# Altium PCB Pedal_SD_USB.PcbDoc
Units mil, origin at the board's own origin, x right, y up, seen from the top; angles counter-clockwise.
Board outline 1550 x 855 mil, 3 copper layers (Top Layer, Mid-Layer 3, Bottom Layer); 22 components, 20 nets, 89 pads, 35 vias.
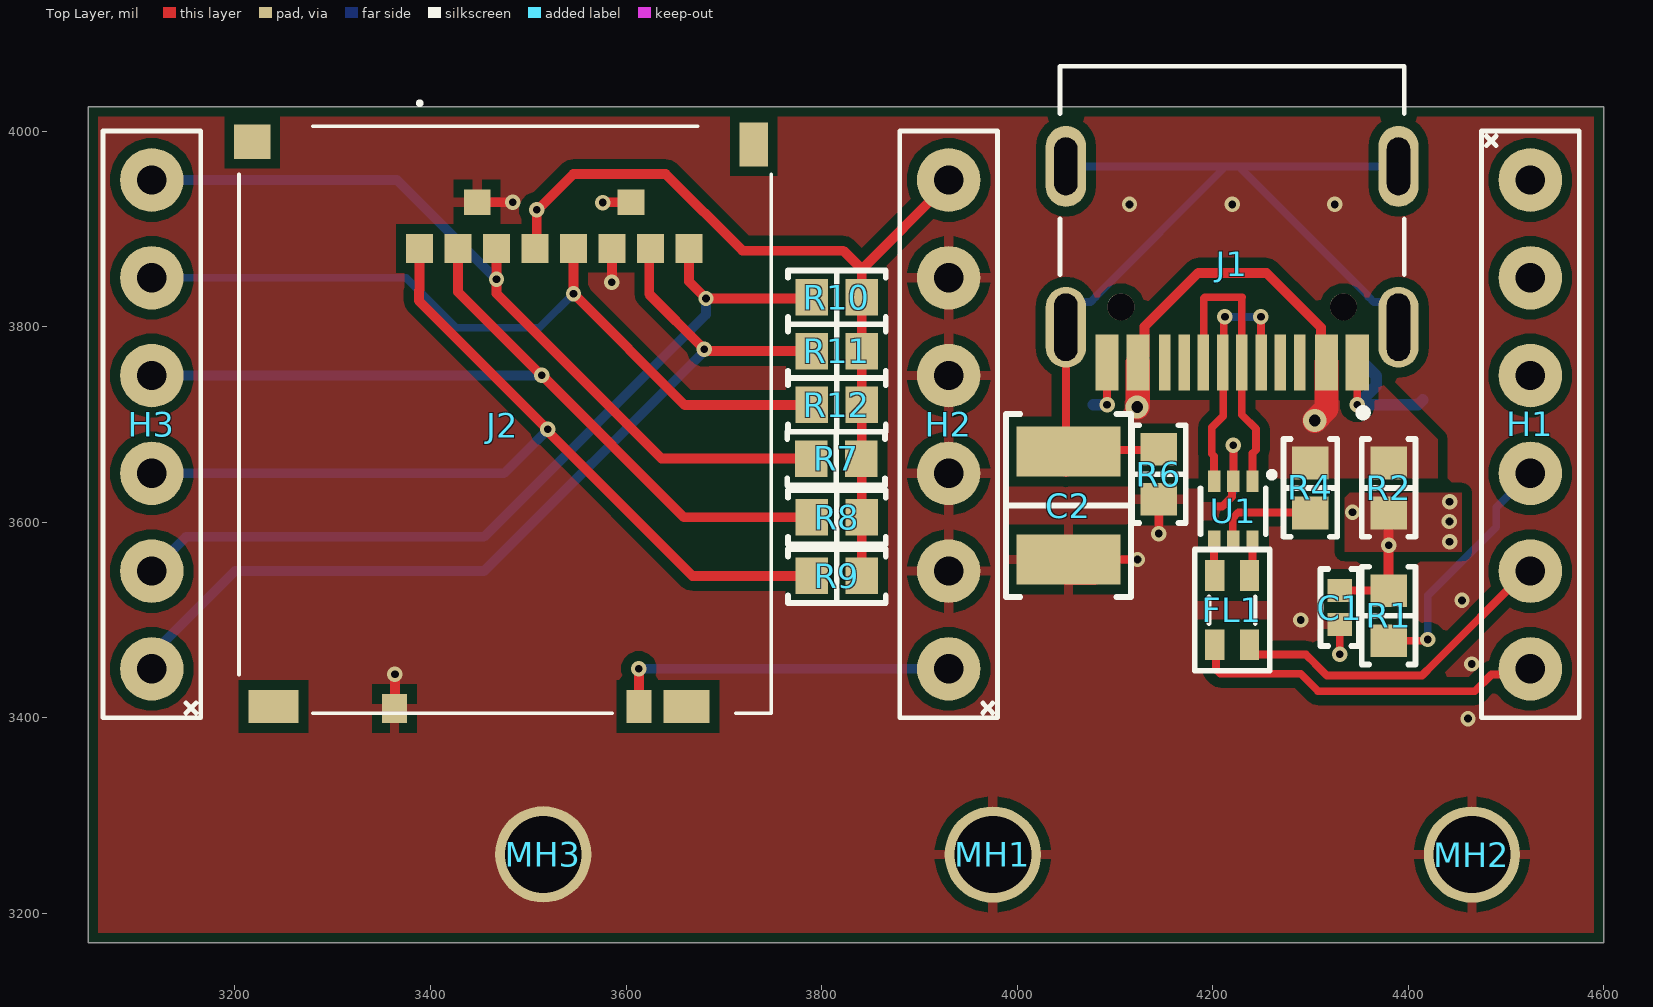
[diagram p0: Top Layer view]
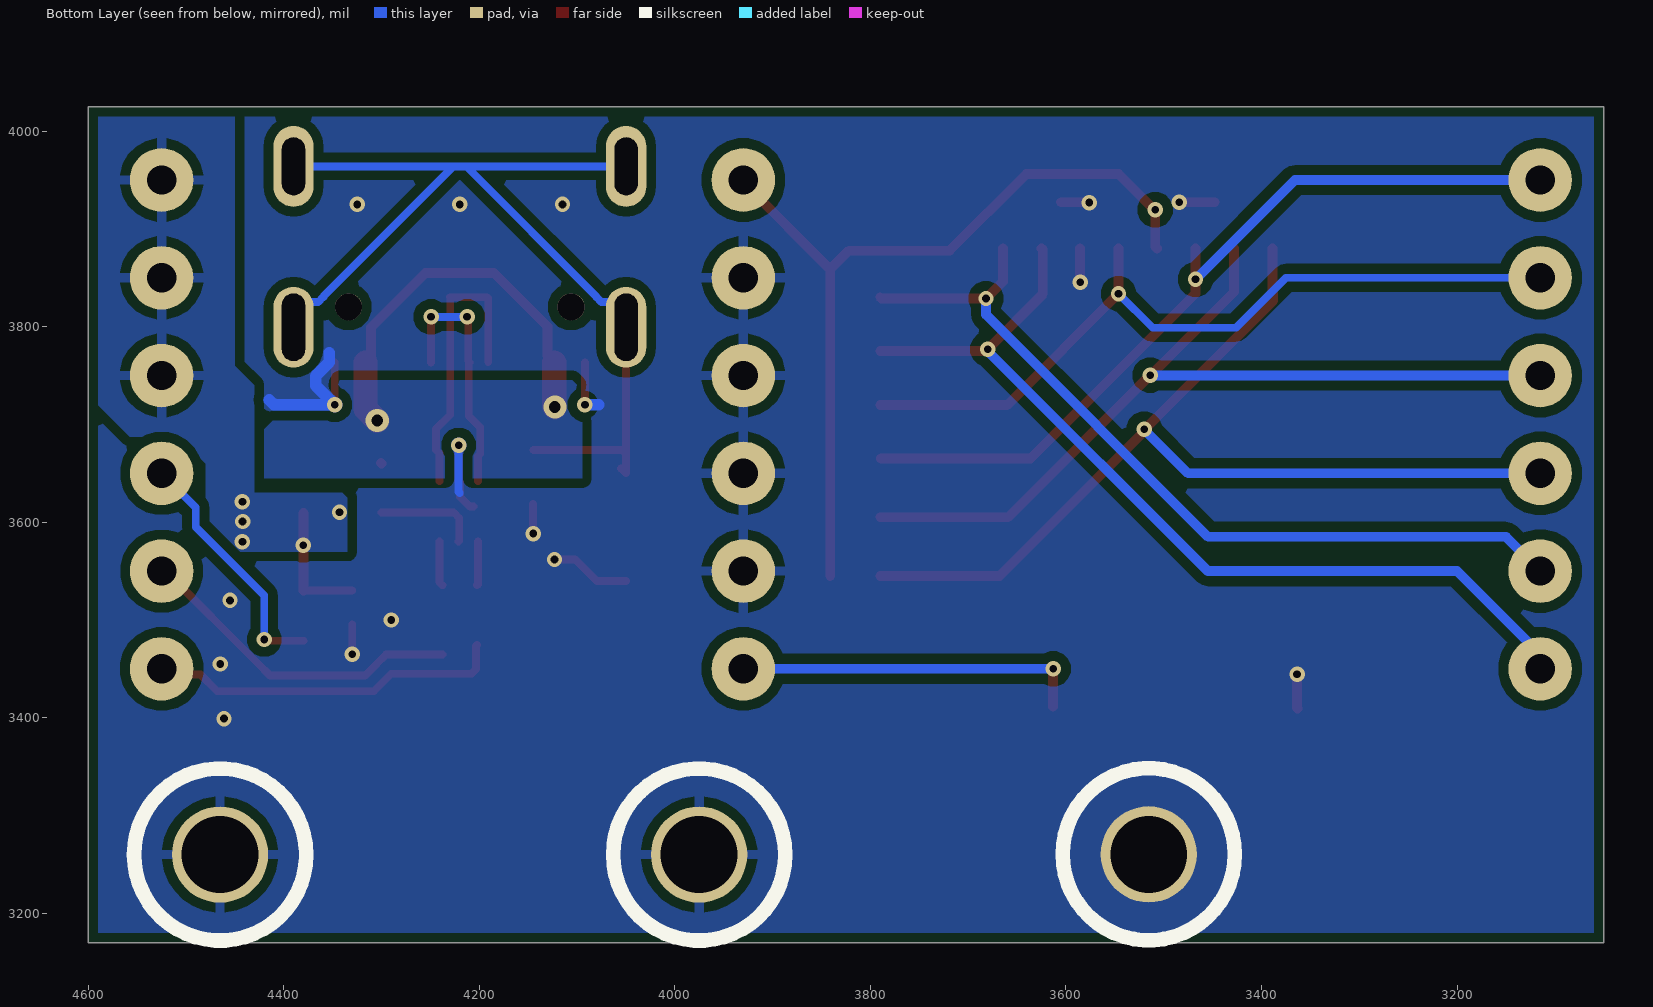
[diagram p1: Bottom Layer view, seen from below]
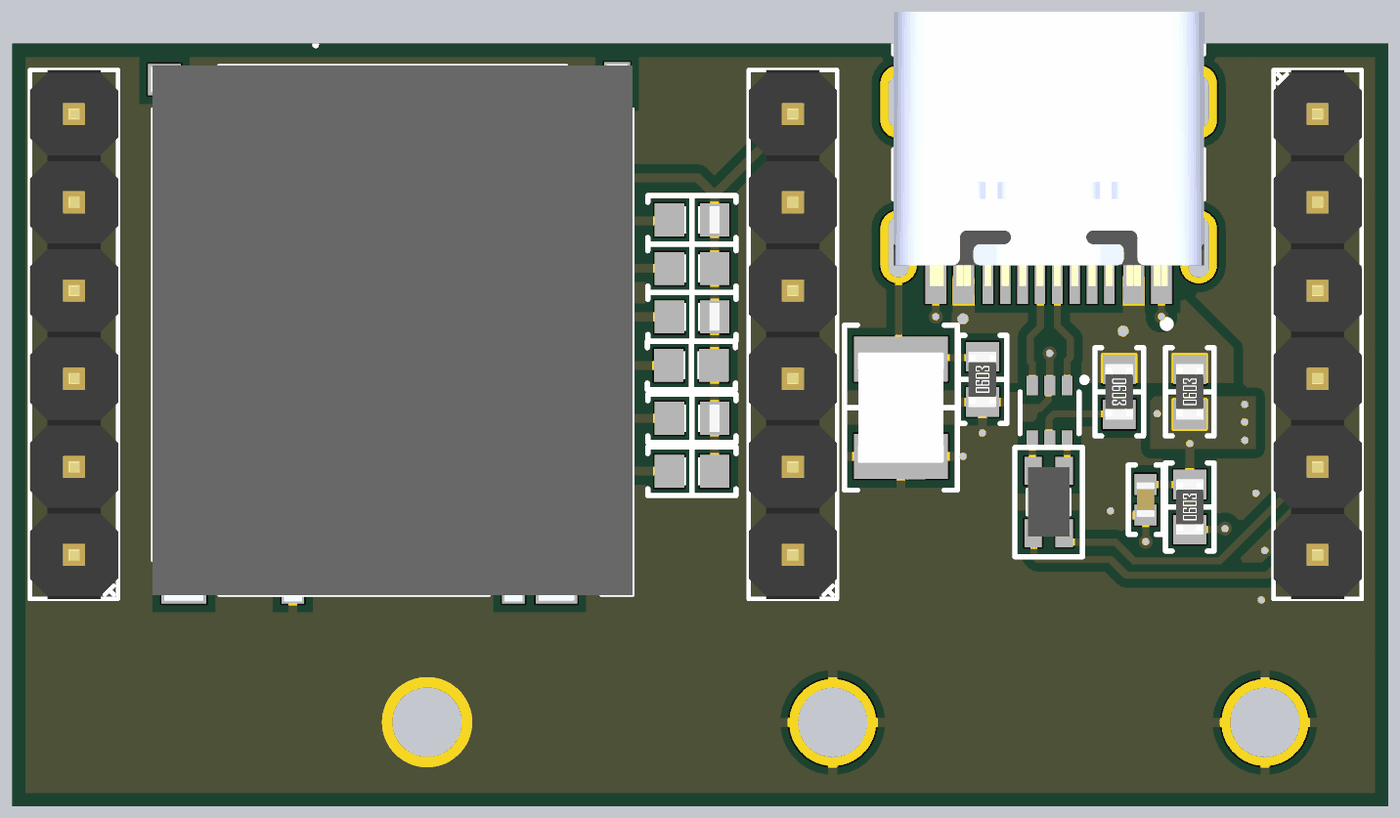
[diagram p2: 3D render of the assembled board from above, using the file's embedded part models]

## Layer stack, top to bottom
Top Solder: solder mask 0.4, Solder Resist, Dk 3.5
Top Layer: signal copper 1.4
Dielectric 1: dielectric 12.6, FR-4, Dk 4.8
Mid-Layer 3: signal copper 14
Dielectric3: dielectric 12.6, FR-4, Dk 4.8
Bottom Layer: signal copper 1.4
Bottom Solder: solder mask 0.4, Solder Resist, Dk 3.5

## Board outline
3050,3170 3050,4025 4600,4025 4600,3170

## Design rules (kind name [scope] priority, off if disabled: settings)
BoardOutlineClearance [All] p1: gap=10 ignorepadtopadclearanceinfootprint=FALSE except(0: Arc-SplitContinuation Track-SplitContinuation SMDPad-SplitContinuation THPad-SplitContinuation Via-SplitContinuation Fill-SplitContinuation Poly-SplitContinuation Region-SplitContinuation Text-SplitContinuation)
Clearance [All] p1: gap=10 ignorepadtopadclearanceinfootprint=TRUE except(8: Arc-Arc Arc-Track Arc-SMDPad Track-Track Track-SMDPad)
HoleSize [All] p1: absolutevalues=TRUE maxlimit=157.48 minlimit=1 maxpercent=80.000 minpercent=20.000
MinimumSolderMaskSliver [All] p1: minsoldermaskwidth=4
PolygonConnect PolygonConnect_18 [All vs IsNamedPolygon('V_USB_L03_P002')] p1: thpad.connectstyle=Relief thpad.reliefconductorwidth=10 thpad.reliefentries=4 thpad.polygonreliefangle="90 Angle" thpad.airgapwidth=10 smdpad.connectstyle=Direct smdpad.reliefconductorwidth=10 smdpad.reliefentries=4 smdpad.polygonreliefangle="90 Angle" smdpad.airgapwidth=10 via.connectstyle=Direct via.reliefconductorwidth=10 via.reliefentries=4 via.polygonreliefangle="90 Angle" via.airgapwidth=10
PolygonConnect PolygonConnect_17 [All vs IsNamedPolygon('V_USB_L03_P003')] p2: thpad.connectstyle=Relief thpad.reliefconductorwidth=10 thpad.reliefentries=4 thpad.polygonreliefangle="90 Angle" thpad.airgapwidth=10 smdpad.connectstyle=Direct smdpad.reliefconductorwidth=10 smdpad.reliefentries=4 smdpad.polygonreliefangle="90 Angle" smdpad.airgapwidth=10 via.connectstyle=Direct via.reliefconductorwidth=10 via.reliefentries=4 via.polygonreliefangle="90 Angle" via.airgapwidth=10
PolygonConnect PolygonConnect_16 [All vs IsNamedPolygon('V_USB_L01_P004')] p3: thpad.connectstyle=Relief thpad.reliefconductorwidth=10 thpad.reliefentries=4 thpad.polygonreliefangle="90 Angle" thpad.airgapwidth=10 smdpad.connectstyle=Direct smdpad.reliefconductorwidth=10 smdpad.reliefentries=4 smdpad.polygonreliefangle="90 Angle" smdpad.airgapwidth=10 via.connectstyle=Direct via.reliefconductorwidth=10 via.reliefentries=4 via.polygonreliefangle="90 Angle" via.airgapwidth=10
PolygonConnect PolygonConnect_15 [All vs IsNamedPolygon('NETJ1_A4B9_L03_P006')] p4: thpad.connectstyle=Relief thpad.reliefconductorwidth=10 thpad.reliefentries=4 thpad.polygonreliefangle="90 Angle" thpad.airgapwidth=10 smdpad.connectstyle=Relief smdpad.reliefconductorwidth=10 smdpad.reliefentries=4 smdpad.polygonreliefangle="90 Angle" smdpad.airgapwidth=10 via.connectstyle=Direct via.reliefconductorwidth=10 via.reliefentries=4 via.polygonreliefangle="90 Angle" via.airgapwidth=10
PolygonConnect PolygonConnect_14 [All vs IsNamedPolygon('GND_L03_P010')] p5: thpad.connectstyle=Relief thpad.reliefconductorwidth=10 thpad.reliefentries=4 thpad.polygonreliefangle="90 Angle" thpad.airgapwidth=10 smdpad.connectstyle=Relief smdpad.reliefconductorwidth=10 smdpad.reliefentries=4 smdpad.polygonreliefangle="90 Angle" smdpad.airgapwidth=10 via.connectstyle=Direct via.reliefconductorwidth=10 via.reliefentries=4 via.polygonreliefangle="90 Angle" via.airgapwidth=10
PolygonConnect PolygonConnect_13 [All vs IsNamedPolygon('NETJ1_A4B9_L01_P008')] p6: thpad.connectstyle=Relief thpad.reliefconductorwidth=10 thpad.reliefentries=4 thpad.polygonreliefangle="90 Angle" thpad.airgapwidth=10 smdpad.connectstyle=Direct smdpad.reliefconductorwidth=10 smdpad.reliefentries=4 smdpad.polygonreliefangle="90 Angle" smdpad.airgapwidth=10 via.connectstyle=Direct via.reliefconductorwidth=10 via.reliefentries=4 via.polygonreliefangle="90 Angle" via.airgapwidth=10
PolygonConnect PolygonConnect_12 [All vs IsNamedPolygon('V_USB_L03_P003')] p7: thpad.connectstyle=Relief thpad.reliefconductorwidth=10 thpad.reliefentries=4 thpad.polygonreliefangle="90 Angle" thpad.airgapwidth=10 smdpad.connectstyle=Direct smdpad.reliefconductorwidth=10 smdpad.reliefentries=4 smdpad.polygonreliefangle="90 Angle" smdpad.airgapwidth=10 via.connectstyle=Direct via.reliefconductorwidth=10 via.reliefentries=4 via.polygonreliefangle="90 Angle" via.airgapwidth=10
PolygonConnect PolygonConnect_11 [All vs IsNamedPolygon('V_USB_L01_P005')] p8: thpad.connectstyle=Relief thpad.reliefconductorwidth=10 thpad.reliefentries=4 thpad.polygonreliefangle="90 Angle" thpad.airgapwidth=10 smdpad.connectstyle=Direct smdpad.reliefconductorwidth=10 smdpad.reliefentries=4 smdpad.polygonreliefangle="90 Angle" smdpad.airgapwidth=10 via.connectstyle=Direct via.reliefconductorwidth=10 via.reliefentries=4 via.polygonreliefangle="90 Angle" via.airgapwidth=10
PolygonConnect PolygonConnect_10 [All vs IsNamedPolygon('NETJ1_A4B9_L03_P006')] p9: thpad.connectstyle=Relief thpad.reliefconductorwidth=10 thpad.reliefentries=4 thpad.polygonreliefangle="90 Angle" thpad.airgapwidth=10 smdpad.connectstyle=Direct smdpad.reliefconductorwidth=10 smdpad.reliefentries=4 smdpad.polygonreliefangle="90 Angle" smdpad.airgapwidth=10 via.connectstyle=Direct via.reliefconductorwidth=10 via.reliefentries=4 via.polygonreliefangle="90 Angle" via.airgapwidth=10
PolygonConnect PolygonConnect_9 [All vs IsNamedPolygon('NETJ1_A4B9_L03_P006')] p10: thpad.connectstyle=Relief thpad.reliefconductorwidth=10 thpad.reliefentries=4 thpad.polygonreliefangle="90 Angle" thpad.airgapwidth=10 smdpad.connectstyle=Direct smdpad.reliefconductorwidth=10 smdpad.reliefentries=4 smdpad.polygonreliefangle="90 Angle" smdpad.airgapwidth=10 via.connectstyle=Direct via.reliefconductorwidth=10 via.reliefentries=4 via.polygonreliefangle="90 Angle" via.airgapwidth=10
PolygonConnect PolygonConnect_8 [All vs InNet('GND')] p11: thpad.connectstyle=Relief thpad.reliefconductorwidth=10 thpad.reliefentries=4 thpad.polygonreliefangle="90 Angle" thpad.airgapwidth=10 smdpad.connectstyle=Relief smdpad.reliefconductorwidth=10 smdpad.reliefentries=4 smdpad.polygonreliefangle="90 Angle" smdpad.airgapwidth=10 via.connectstyle=Direct via.reliefconductorwidth=10 via.reliefentries=4 via.polygonreliefangle="90 Angle" via.airgapwidth=10
PolygonConnect PolygonConnect_7 [All vs InNet('+MCU')] p12: thpad.connectstyle=Relief thpad.reliefconductorwidth=10 thpad.reliefentries=4 thpad.polygonreliefangle="90 Angle" thpad.airgapwidth=10 smdpad.connectstyle=Relief smdpad.reliefconductorwidth=10 smdpad.reliefentries=4 smdpad.polygonreliefangle="90 Angle" smdpad.airgapwidth=10 via.connectstyle=Direct via.reliefconductorwidth=10 via.reliefentries=4 via.polygonreliefangle="90 Angle" via.airgapwidth=10
PolygonConnect PolygonConnect_6 [All vs InNet('+5V')] p13: thpad.connectstyle=Relief thpad.reliefconductorwidth=10 thpad.reliefentries=4 thpad.polygonreliefangle="90 Angle" thpad.airgapwidth=10 smdpad.connectstyle=Relief smdpad.reliefconductorwidth=10 smdpad.reliefentries=4 smdpad.polygonreliefangle="90 Angle" smdpad.airgapwidth=10 via.connectstyle=Direct via.reliefconductorwidth=10 via.reliefentries=4 via.polygonreliefangle="90 Angle" via.airgapwidth=10
PolygonConnect PolygonConnect_5 [All vs IsNamedPolygon('+5V_L01_P002')] p14: thpad.connectstyle=Relief thpad.reliefconductorwidth=10 thpad.reliefentries=4 thpad.polygonreliefangle="90 Angle" thpad.airgapwidth=10 smdpad.connectstyle=Direct smdpad.reliefconductorwidth=10 smdpad.reliefentries=4 smdpad.polygonreliefangle="90 Angle" smdpad.airgapwidth=10 via.connectstyle=Direct via.reliefconductorwidth=10 via.reliefentries=4 via.polygonreliefangle="90 Angle" via.airgapwidth=10
PolygonConnect PolygonConnect_4 [All vs IsNamedPolygon('V_USB_L01_P001')] p15: thpad.connectstyle=Relief thpad.reliefconductorwidth=10 thpad.reliefentries=4 thpad.polygonreliefangle="90 Angle" thpad.airgapwidth=10 smdpad.connectstyle=Direct smdpad.reliefconductorwidth=10 smdpad.reliefentries=4 smdpad.polygonreliefangle="90 Angle" smdpad.airgapwidth=10 via.connectstyle=Direct via.reliefconductorwidth=10 via.reliefentries=4 via.polygonreliefangle="90 Angle" via.airgapwidth=10
PolygonConnect PolygonConnect_3 [All vs IsNamedPolygon('NETD1_1_L01_P003')] p16: thpad.connectstyle=Relief thpad.reliefconductorwidth=10 thpad.reliefentries=4 thpad.polygonreliefangle="90 Angle" thpad.airgapwidth=10 smdpad.connectstyle=Direct smdpad.reliefconductorwidth=10 smdpad.reliefentries=4 smdpad.polygonreliefangle="90 Angle" smdpad.airgapwidth=10 via.connectstyle=Direct via.reliefconductorwidth=10 via.reliefentries=4 via.polygonreliefangle="90 Angle" via.airgapwidth=10
PolygonConnect PolygonConnect_2 [All vs IsNamedPolygon('GND_L01_P005')] p17: thpad.connectstyle=Relief thpad.reliefconductorwidth=10 thpad.reliefentries=4 thpad.polygonreliefangle="90 Angle" thpad.airgapwidth=10 smdpad.connectstyle=Direct smdpad.reliefconductorwidth=10 smdpad.reliefentries=4 smdpad.polygonreliefangle="90 Angle" smdpad.airgapwidth=10 via.connectstyle=Direct via.reliefconductorwidth=10 via.reliefentries=4 via.polygonreliefangle="90 Angle" via.airgapwidth=10
PolygonConnect PolygonConnect_1 [All vs IsNamedPolygon('6V6_L01_P001')] p18: thpad.connectstyle=Relief thpad.reliefconductorwidth=10 thpad.reliefentries=4 thpad.polygonreliefangle="90 Angle" thpad.airgapwidth=10 smdpad.connectstyle=Direct smdpad.reliefconductorwidth=10 smdpad.reliefentries=4 smdpad.polygonreliefangle="90 Angle" smdpad.airgapwidth=10 via.connectstyle=Direct via.reliefconductorwidth=10 via.reliefentries=4 via.polygonreliefangle="90 Angle" via.airgapwidth=10
PolygonConnect [All] p19: connectstyle=Relief reliefconductorwidth=10 reliefentries=4 polygonreliefangle="90 Angle" airgapwidth=10
RoutingVias [All] p1: holewidth=11.81 width=23.62 viastyle="Through Hole" minholewidth=11.81 minwidth=23.62 maxholewidth=11.81 maxwidth=23.62
SolderMaskExpansion [All] p1: expansion=2 istentingtop=FALSE
Width [All] p1: maxlimit=20 minlimit=8 preferedwidth=8
28 further rules are at their usual default settings.

## Components (designator, comment, footprint, x,y, rotation, side; value= is the part's Value field where it differs from the comment)
C1 "0.1µF" "CAP 0402_1005" 4330,3512.68 r90 top
C2 "10000 pF" "CAP 1210_3225 - 1MM" 4052.5,3617.07 r90 top
FL1 "Z=90Ohm" FIL_ACM2012-361-2P-T002 4220,3510 r270 top
H1 "arduino_header_6" header-6_male 4525,3950 r270 top
H2 "arduino_header_6" header-6_male 3930,3450 r90 top
H3 "arduino_header_6" header-6_male 3115,3450 r90 top
J1 "TYPE-C-31-M-12" "HRO_TYPE-C-31-M-12 - REZONIT" 4220,3963.94 r180 top
J2 "SCHA4B0400" SCHA4B0400 3476.38,3927.24 r180 top
MH1 "MountingHole" Hole_2.5mm 3975.19,3260.01 r0 top
MH2 "MountingHole" Hole_2.5mm 4465.19,3260.01 r0 top
MH3 "MountingHole" Hole_2.5mm 3515.34,3260.32 r0 top (schematic designator MH1)
R1 "" "RES 0603_1608" 4380,3504.41 r90 top value="1 MOhms"
R2 "=Value" "RES 0603_1608" 4380,3635 r90 top
R4 "=Value" "RES 0603_1608" 4300,3635 r270 top
R6 "1 MOhms" "RES 0603_1608" 4145,3649.1 r90 top
R7 "10 kOhms" "RES 0603_1608" 3815,3665 r0 top
R8 "10 kOhms" "RES 0603_1608" 3815.59,3605 r0 top
R9 "10 kOhms" "RES 0603_1608" 3815.59,3545 r0 top
R10 "10 kOhms" "RES 0603_1608" 3815.59,3830 r0 top
R11 "10 kOhms" "RES 0603_1608" 3815.59,3775 r0 top
R12 "10 kOhms" "RES 0603_1608" 3815.59,3720 r0 top
U1 "" SOT-666 4221.18,3611.18 r270 top

## Footprints (in the part's own frame and the unit in brackets; to place one, negate y for a bottom-side part, rotate by r counter-clockwise, add the part's x,y. Pads: shape width x height; smd on the part's side, far side on the other; paste and mask are expansions set on the pad)
"CAP 0402_1005" [mm] "Chip Capacitor, 2-Leads, Body 1.02x0.51mm, IPC Medium Density"
  rect 0.6x0.64 smd: 1(-0.44,0) 2(0.44,0)
  silkscreen extent -1,-0.5 1,0.5, body extent -0.5,-0.26 0.5,0.26, height 0.52
"CAP 1210_3225 - 1MM" [mm] "Chip Capacitor, 2-Leads, Body 3.20x2.50mm, IPC Medium Density"
  rect 1.3x2.7 smd: 1(-1.4,0) 2(1.4,0)
  silkscreen extent -2.37,-1.63 2.37,1.63, body extent -1.6,-1.25 1.6,1.25, height 1
FIL_ACM2012-361-2P-T002 [mm]
  rect 0.8x0.5 smd: 1(-0.9,0.45) 2(-0.9,-0.45) 3(0.9,-0.45) 4(0.9,0.45)
  silkscreen extent -1.58,-0.98 1.58,0.98, body extent -1,-0.6 1,0.6, height 1.3
header-6_male [mil]
  round 65 hole 30: 1(0,0) 2(100,0) 3(200,0) 4(300,0) 5(400,0) 6(500,0)
  silkscreen extent -50,-50 550,50, body extent -50,-50 550,50, height 339
Hole_2.5mm [mm]
  round 2.5 hole 2: 0(0,0)
  body extent -0.5,-0.5 0.5,0.5, height 0.5
"HRO_TYPE-C-31-M-12 - REZONIT" [mm]
  rect 0.6x1.45 smd: A1B12(-3.25,5.095) A4B9(-2.45,5.095) B1A12(3.25,5.095) B4A9(2.45,5.095)
  rect 0.3x1.45 smd: A5(-1.25,5.095) A6(-0.25,5.095) A7(0.25,5.095) A8(1.25,5.095) B5(1.75,5.095) B6(0.75,5.095) B7(-0.75,5.095) B8(-1.75,5.095)
  oval 1.05x2.1 hole 0.6 slot 1.75 at 90 deg: S1(-4.32,4.18) S2(4.32,4.18)
  oval 1.05x2.1 hole 0.6 slot 1.5 at 90 deg: S3(-4.32,0) S4(4.32,0)
  round 0.7 hole 0.7 unplated: ""(-2.89,3.65) ""(2.89,3.65)
  silkscreen extent -4.47,-2.6 4.47,6.5, body extent -4.47,-2.6 4.47,5.31, height 3.31
"RES 0603_1608" [mm] "Chip Resistor, 2-Leads, Body 1.60x0.80mm, IPC Medium Density"
  rect 0.85x0.95 smd: 1(-0.65,0) 2(0.65,0)
  silkscreen extent -1.27,-0.7 1.27,0.7, body extent -0.8,-0.4 0.8,0.4, height 0.45
SCHA4B0400 [mm]
  rect 0.7x0.75 smd: 1(2.225,1.2) 2(1.225,1.2) 3(0.225,1.2) 4(-0.775,1.2) 5(-1.775,1.2) 6(-2.775,1.2) 7(-3.775,1.2) 8(-4.775,1.2)
  rect 0.7x0.65 smd: 9(-3.275,0) 10(0.725,0)
  rect 0.65x0.85 smd: 11(-3.475,13.1)
  rect 0.65x0.75 smd: 12(2.875,13.15)
  rect 1.3x0.85 smd: MP1(6.013,13.1)
  rect 0.95x0.9 smd: MP2(6.575,-1.575)
  rect 0.745x1.15 smd: MP3(-6.46,-1.5)
  rect 1.2x0.85 smd: MP4(-4.713,13.1)
  silkscreen extent -6.91,-2.62 6.91,13.28, body extent -6.91,-2 6.96,13.46, height 1.39
SOT-666 [mm]
  rect 0.56x0.32 smd mask+0.025: 1(-0.785,0.5) 2(-0.785,0) 3(-0.785,-0.5) 4(0.785,-0.5) 5(0.785,0) 6(0.785,0.5)
  silkscreen extent -1,-0.85 0.6,1.05, body extent -0.6,-0.8 0.6,0.8, height 0.6

## Part data
C1: library part C0402C104K4RACAUTO, "CAP CER 0.1UF 16V X7R 0402", Device Package="0402 (1005 Metric)", Manufacturer=KEMET, Operating Temperature="-55°C ~ 125°C", Ratings=AEC-Q200, Supplier Part Number 1=399-6828-1-ND, Temperature Coefficient=X7R, Tolerance=±10%, Voltage - Rated=16V, Applications="Automotive, Bypass, Decoupling", Capacitance=0.1µF, ComponentLink1Description=Datasheet, ComponentLink1URL=https://api.kemet.com/component-edge/download/specsheet/C0402C104K4RACAUTO.pdf, ComponentLink2Description="DigiKey Link", ComponentLink2URL=http://digikey.com/product-detail/en/kemet/C0402C104K4RACAUTO/399-6828-1-ND/3314343, LastUpdated="9/2/2020 1:02:21 AM", Lifecycle Status=Active, Minimum Order=1, Mounting Type="Surface Mount, MLCC", Package / Case="0402 (1005 Metric)", Packaging=TapeAndReel, Part Number=C0402C104K4RACAUTO, Part Status=Active, PartId=3024, Price=0.01, Series="SMD Auto X7R", Size / Dimension="0.039\" L x 0.020\" W (1.00mm x 0.50mm)", Supplier 1=DigiKey, Thickness (Max)="0.022\" (0.55mm)"
C2: library part C1210C103KDRAC7800, "CAP CER 10000PF 1KV X7R 1210", Device Package="1210 (3225 Metric)", Manufacturer=KEMET, Operating Temperature="-55°C ~ 125°C", Supplier Part Number 1=399-C1210C103KDRAC7800CT-ND, Temperature Coefficient=X7R, Tolerance=±10%, Voltage - Rated="1000V (1kV)", Applications="General Purpose", Capacitance="10000 pF", ComponentLink1Description=Datasheet, ComponentLink1URL=https://api.kemet.com/component-edge/download/datasheet/C1210C103KDRACTU.pdf, ComponentLink2Description="DigiKey Link", ComponentLink2URL=https://www.digikey.com/en/products/detail/kemet/C1210C103KDRAC7800/2216434, Features="Low ESL, High Voltage", LastUpdated="9/16/2023 7:34:43 PM", Lifecycle Status=Active, Minimum Order=1, Mounting Type="Surface Mount, MLCC", Package / Case="1210 (3225 Metric)", Packaging=TapeAndReel, Part Number=C1210C103KDRAC7800, Part Status=Active, PartId=29443, Price=0.09, Series="SMD Comm X7R HV", Size / Dimension="0.126\" L x 0.098\" W (3.20mm x 2.50mm)", Supplier 1=DigiKey, Thickness (Max)="0.061\" (1.55mm)"
FL1: library part ACM2012-361-2P-T002, "ACM Series 0805 360 Ohm 220mA 500 mOhm DCR 50 V SMT Common Mode Filter", Package=None, Availability=Good, MF=TDK, MP=ACM2012-361-2P-T002, Price="0.24 USD"
J1: "USB Connectors 24 Receptacle 1 8.94*7.3mm RoHS", Package=None, Availability=Unavailable, MF="{'manufacturer': u'HRO Electronics Co., Ltd.'}", MP=TYPE-C-31-M-12, Price=None
J2: "SD card Connector", Manufacturer_Name="ALPS Electric", Mouser Part Number=688-SCHA4B0400, Datasheet Link=https://br.mouser.com/datasheet/2/15/SCHA-1155938.pdf, Height=1.29mm, Manufacturer_Part_Number=SCHA4B0400, Mouser Price/Stock=https://www.mouser.com/Search/Refine.aspx?Keyword=688-SCHA4B0400
R1: library part ERJ-3EKF1004V, "RES SMD 1M OHM 1% 1/10W 0603", Device Package="0603 (1608 Metric)", Manufacturer="Panasonic Electronic Components", Operating Temperature="-55°C ~ 155°C", Power (Watts)="0.1W, 1/10W", Ratings=AEC-Q200, Resistance="1 MOhms", Supplier Device Package=0603, Supplier Part Number 1=P1.00MHCT-ND, Temperature Coefficient=±100ppm/°C, Tolerance=±1%, ComponentLink1Description=Datasheet, ComponentLink1URL=https://industrial.panasonic.com/cdbs/www-data/pdf/RDA0000/AOA0000C304.pdf, ComponentLink2Description="DigiKey Link", ComponentLink2URL=https://www.digikey.com/en/products/detail/panasonic-electronic-components/ERJ-3EKF1004V/196033, Composition="Thick Film", Features="Automotive AEC-Q200", Height - Seated (Max)="0.022\" (0.55mm)", LastUpdated="2/9/2024 8:42:00 PM", Lifecycle Status=Active, Minimum Order=1, Number of Terminations=2, Package / Case="0603 (1608 Metric)", Packaging=TapeAndReel, Part Number=ERJ-3EKF1004V, Part Status=Active, PartId=25691, Price=0.01, Series=ERJ-3EK, Size / Dimension="0.063\" L x 0.031\" W (1.60mm x 0.80mm)", Supplier 1=DigiKey
R2 R4: library part RCA06030000ZSEA, "RES SMD 0 OHM JUMPER 1/10W 0603", Device Package="0603 (1608 Metric)", Manufacturer="Vishay Dale", Operating Temperature="-55°C ~ 155°C", Power (Watts)="0.1W, 1/10W", Ratings=AEC-Q200, Supplier Device Package=0603, Supplier Part Number 1=541-2192-1-ND, Tolerance=Jumper, ComponentLink1Description=Datasheet, ComponentLink1URL=http://www.vishay.com/docs/20037/rcae3.pdf, ComponentLink2Description="DigiKey Link", ComponentLink2URL=http://digikey.com/product-detail/en/vishay-dale/RCA06030000ZSEA/541-2192-1-ND/4946845, Composition="Thick Film", Features="Anti-Sulfur, Automotive AEC-Q200", Height - Seated (Max)="0.020\" (0.50mm)", LastUpdated="9/2/2020 1:10:23 AM", Lifecycle Status=Active, Minimum Order=1, Number of Terminations=2, Package / Case="0603 (1608 Metric)", Packaging=TapeAndReel, Part Number=RCA06030000ZSEA, Part Status=Active, PartId=5740, Price=0.01, Series=RCA, Size / Dimension="0.061\" L x 0.033\" W (1.55mm x 0.85mm)", Supplier 1=DigiKey
R6: library part ERJ-3EKF1004V, "RES SMD 1M OHM 1% 1/10W 0603", Device Package="0603 (1608 Metric)", Manufacturer="Panasonic Electronic Components", Operating Temperature="-55°C ~ 155°C", Power (Watts)="0.1W, 1/10W", Ratings=AEC-Q200, Supplier Device Package=0603, Supplier Part Number 1=P1.00MHCT-ND, Temperature Coefficient=±100ppm/°C, Tolerance=±1%, ComponentLink1Description=Datasheet, ComponentLink1URL=https://industrial.panasonic.com/cdbs/www-data/pdf/RDA0000/AOA0000C304.pdf, ComponentLink2Description="DigiKey Link", ComponentLink2URL=https://www.digikey.com/en/products/detail/panasonic-electronic-components/ERJ-3EKF1004V/196033, Composition="Thick Film", Features="Automotive AEC-Q200", Height - Seated (Max)="0.022\" (0.55mm)", LastUpdated="2/9/2024 8:42:00 PM", Lifecycle Status=Active, Minimum Order=1, Number of Terminations=2, Package / Case="0603 (1608 Metric)", Packaging=TapeAndReel, Part Number=ERJ-3EKF1004V, Part Status=Active, PartId=25691, Price=0.01, Resistance="1 MOhms", Series=ERJ-3EK, Size / Dimension="0.063\" L x 0.031\" W (1.60mm x 0.80mm)", Supplier 1=DigiKey
R7 R8 R9 R10 R11 R12: library part ERJ-3EKF1002V, "RES SMD 10K OHM 1% 1/10W 0603", Device Package="0603 (1608 Metric)", Manufacturer="Panasonic Electronic Components", Operating Temperature="-55°C ~ 155°C", Power (Watts)="0.1W, 1/10W", Ratings=AEC-Q200, Supplier Device Package=0603, Supplier Part Number 1=P10.0KHCT-ND, Temperature Coefficient=±100ppm/°C, Tolerance=±1%, ComponentLink1Description=Datasheet, ComponentLink1URL=https://industrial.panasonic.com/cdbs/www-data/pdf/RDA0000/AOA0000C304.pdf, ComponentLink2Description="DigiKey Link", ComponentLink2URL=https://www.digikey.com/en/products/detail/panasonic-electronic-components/ERJ-3EKF1002V/196066, Composition="Thick Film", Features="Automotive AEC-Q200", Height - Seated (Max)="0.022\" (0.55mm)", LastUpdated="2/9/2024 8:41:59 PM", Lifecycle Status=Active, Minimum Order=1, Number of Terminations=2, Package / Case="0603 (1608 Metric)", Packaging=TapeAndReel, Part Number=ERJ-3EKF1002V, Part Status=Active, PartId=25695, Price=0.01, Resistance="10 kOhms", Series=ERJ-3EK, Size / Dimension="0.063\" L x 0.031\" W (1.60mm x 0.80mm)", Supplier 1=DigiKey
U1: library part USBLC6-2, "Very Low Capacitance Esd Protection", Package="SOT-563 STMicroelectronics", Availability=Unavailable, HelpURL=https://lib.chipdip.ru/093/DOC001093117.pdf, MF=STMicroelectronics, MP=USBLC6-2, Price=None

## Via types
v1: diameter 15.75, hole 7.87, Top Layer to Bottom Layer, tented both sides, 33 vias
v2: diameter 23.62/23.62/23.62 (per signal layer), hole 12, Top Layer to Bottom Layer, tented top, 2 vias

## Nets (pads, with @x,y where several pads share a name; then routed paths per layer and width w, separated by ;. In a path a pad name is that pad's centre, name@x,y a point inside that pad or via, vN(x,y) a via of type N, cw(c..) or ccw(c..) an arc to the next point about the centre after c; other vN are vias at no path point)
+MCU: H2.6 J2.4 R7.2 R8.2 R9.2 R10.2 R11.2 R12.2 | length 865.1
  Top Layer w10: J2.4 3508.76,3881.87 v1(3508.76,3919.53) ; v1@3510,3920 3546.11,3956.11 3640.58,3956.11 3718.99,3877.7 3822.18,3877.7 3841.18,3858.7 ; R9.2 R8.2 R10.2 3841.18,3858.7 ; H2.6@3930,3945 3927.49,3945 3841.18,3858.7
GND: C1.1 C2.1 H2.2 H2.3 H2.4 H2.5 J1.A1B12 J1.B1A12 J2.6 J2.9 J2.10 J2.12 MH1.0 MH2.0 MH3.0 R6.1 U1.2 | length 636.5
  Top Layer w8: C2.1@4050,3539.76 4079.89,3539.76 4102,3561.87 v1(4123.16,3561.87) ; v1(4092.05,3720.2) J1.B1A12@4092.05,3763.35 ; v1(4144.87,3588.37) 4145,3588.5 R6.1@4145,3618.5 ; 4206.09,3616.03 4209.74,3616.03 4219.8,3626.09 4219.8,3640.7 U1.2 v1(4221.18,3678.7) ; v1(4330,3465) C1.1 ; v1(4347.95,3720.2) J1.A1B12@4347.95,3763.35
  Top Layer w10: J2.12 3363.66,3410 v1(3363.66,3444.61) ; J2.10 v1(3484.2,3927.24) ; v1(3576.07,3926.88) 3576.43,3927.24 J2.9 ; v1@3585,3845 v1(3585.32,3845.32) 3585.63,3845.63 J2.6
  Bottom Layer w8: 4220,3630 4221.18,3631.18 v1(4221.18,3678.7)
  Bottom Layer w12: 4077.77,3720.2 v1(4092.05,3720.2) ; 4353.41,3773.29 4353.41,3763.51 4367.37,3749.56 4367.37,3739.62 v1(4347.95,3720.2) 4400.2,3720.2 4400,3720 4410,3720 4415,3725
  other v1: 4461.14,3399.15 4465,3455 4290,3500 4455,3520 4115,3925 4220,3925 4325,3925
NetC2_2: C2.2 J1.S1 J1.S2 J1.S3 J1.S4 R6.2 | length 1033
  Top Layer w8: J1.S2 4049.92,3672.18 4049.92,3650.08 4050,3650 C2.2@4055,3655 ; C2.2 4054.17,3673.85 R6.2@4144.66,3673.85
  Bottom Layer w8: J1.S4 4226.54,3963.94 ; J1.S2@4065.32,3825.08 4075.08,3825.08 4080.44,3830.44 ; 4080.44,3830.92 4213.46,3963.94 ; J1.S1 4390.08,3809.68 4374.68,3825.08 4364.92,3825.08 4359.56,3830.44 4359.56,3830.92 4226.54,3963.94 ; J1.S3 4226.54,3963.94
NetFL1_1: FL1.1 U1.6 | length 46.1
  Top Layer w8: FL1.1@4237.72,3535.43 4240.87,3538.58 U1.6
NetFL1_2: FL1.2 U1.4 | length 45.2
  Top Layer w8: U1.4 4201.5,3536.22 FL1.2@4202.28,3535.43
NetJ1_A4B9: J1.A4B9 J1.B4A9 R2.2 R4.1 | length 414.5
  Top Layer w10: J1.B4A9@4123.54,3763.35 4130.36,3770.16 4130.36,3800.17 4185.19,3855 4255,3855 4310.77,3799.23 4310.77,3769.04 J1.A4B9@4316.46,3763.35
  Top Layer w25: v2(4122.77,3717.71) 4123.54,3718.48 J1.B4A9@4123.54,3763.35 ; v2(4304.48,3703.89) 4316.46,3715.86 J1.A4B9@4316.46,3763.35
NetR4_2: R4.2 U1.5 | length 106.1
  Top Layer w8: U1.5 4220.5,3580.96 4220.5,3604.17 4226.33,3610 R4.2@4300,3610
SD_CK: H3.5 J2.5 R12.1 | length 804
  Top Layer w10: J2.5 v1(3546.26,3833.78) 3660.04,3720 R12.1
  Bottom Layer w8: H3.5 3375,3850 3426.15,3798.85 3511.33,3798.85 v1(3546.26,3833.78)
SD_CMD: H3.6 J2.3 R7.1 | length 832.6
  Top Layer w10: J2.3 3467.5,3833.8 3636.3,3665 R7.1
  Bottom Layer w8: H3.6 H3.6@3126.18,3950
  Bottom Layer w10: H3.6@3126.18,3950 3365.89,3950 v1(3467.5,3848.38)
SD_D0: H3.1 J2.7 R11.1 | length 948
  Top Layer w10: J2.7 3623.78,3878.78 3623.78,3833.11 v1(3679.93,3776.97) 3681.48,3776.97 3683.45,3775 R11.1
  Bottom Layer w10: H3.1 3115,3464.88 3131.09,3480.97 3131.09,3481.09 3200,3550 3455,3550 3677.05,3772.05 3677.05,3772.54 3679.93,3775.41 v1(3679.93,3776.97)
SD_D1: H3.2 J2.8 R10.1 | length 859.1
  Top Layer w10: J2.8 3664.37,3846.23 v1(3681.79,3828.8) 3788.8,3828.8 R10.1
  Bottom Layer w10: H3.2 3150,3585 3454.57,3585 3681.79,3812.23 v1(3681.79,3828.8)
SD_D2: H3.3 J2.1 R9.1 | length 997
  Top Layer w10: J2.1 3388.78,3837.78 3388.2,3837.2 3388.2,3826.41 3519.61,3695 v1(3520,3695) 3520,3693.44 3522.87,3690.57 3522.87,3690.18 3668.06,3545 R9.1
  Bottom Layer w10: H3.3 3475,3650 v1(3520,3695)
SD_D3: H3.4 J2.2 R8.1 | length 900.9
  Top Layer w10: J2.2 3428.15,3835.34 3513.11,3750.38 v1(3513.84,3750.38) 3659.22,3605 R8.1
  Bottom Layer w10: H3.4 3513.46,3750 v1(3513.84,3750.38)
SD_DETECT: H2.1 J2.11 | length 357.4
  Top Layer w10: v1(3613.15,3450) v1(3613.15,3450) J2.11
  Bottom Layer w10: v1(3613.15,3450) 3925,3450 H2.1@3930,3445
USB_DN: J1.A7 J1.B7 U1.3 | length 258.7
  Top Layer w8: U1.3 4201.5,3667.45 4199.02,3669.93 4199.02,3696.84 4210.77,3708.59 J1.A7@4210.77,3763.96 ; J1.A7@4210.16,3763.35 4211.37,3764.56 4211.37,3808.79 v1(4212.59,3810) ; J1.B7@4249.53,3763.35 v1@4249.53,3809.84
  Bottom Layer w8: v1(4212.59,3810) v1(4249.37,3810)
USB_DP: J1.A6 J1.B6 U1.1 | length 300
  Top Layer w8: J1.B6@4190.95,3763.83 4190.95,3828.68 4192.26,3829.99 4230,3830 4229.84,3829.84 4229.84,3710 4244.46,3695.38 4244.46,3674.13 4240.87,3670.54 U1.1
USB_FS_DN: FL1.3 H1.6 | length 365.8
  Top Layer w8: FL1.3 4203.37,3473.48 4203.37,3449.69 4208.06,3445 4290,3445 4307.87,3427.13 4468.06,3427.13 4485.19,3444.25 4519.25,3444.25 H1.6
USB_FS_DP: FL1.4 H1.5 | length 340.5
  Top Layer w8: FL1.4@4237.72,3464.57 4295.49,3464.57 4305,3455.06 4305,3455 4316.87,3443.13 4414.06,3443.13 4425.64,3454.7 4520.93,3550 H1.5
USB_FS_VBUS: H1.4 R1.1 | length 254
  Top Layer w8: R1.1 4418.82,3478.82 v1(4420,3480)
  Bottom Layer w8: v1(4420,3480) 4420,3525 4490,3595 4490,3615 H1.4
V_USB: C1.2 H1.1 H1.2 H1.3 R1.2 R2.1 | length 129.4
  Top Layer w8: C1.2 R1.2
  Top Layer w10: R1.2 v1(4380,3576.46) R2.1
  other v1: 4442.36,3580 4442.21,3600.74 4343.04,3610.27 4442.36,3620.78
pads on no net: J1. J1.A5 J1.A8 J1.B5 J1.B8 J2.MP1 J2.MP2 J2.MP3 J2.MP4
copper on no net: | length 0.8
  Top Layer w10: 4300,3660 4300.59,3660.59

## Polygon pours and split planes (outlines as drawn)
GND on Top Layer "GND_L01_P009" (solid, remove dead copper, pour order 9): 3050,4025 3050,3170 4600,3170 4600,4025
NetJ1_A4B9 on Top Layer "NETJ1_A4B9_L01_P008" (solid, pour order 8): 4430,3645 4095,3645 4095,3735 4105,3745 4370,3745 4430,3685 4430,3675
V_USB on Top Layer "V_USB_L01_P004" (solid, pour order 4): 4335,3625 4335,3570 4455,3570 4455,3630 4340,3630
GND on Bottom Layer "GND_L03_P010" (solid, pour order 10): 3050,4025 3050,3170 4600,3170 4600,4025
V_USB on Bottom Layer "V_USB_L03_P003" (solid, pour order 3): 4335,3625 4335,3570 4455,3570 4455,3630 4340,3630
V_USB on Bottom Layer "V_USB_L03_P002" (solid, pour order 2): 4600,4025 4600,3730 4557.5,3687.5 4507.5,3687.5 4480,3660 4480,3595 4455,3570 4430,3570 4430,3740 4450,3760 4450,4030
NetJ1_A4B9 on Bottom Layer "NETJ1_A4B9_L03_P006" (solid, pour order 6): 4430,3645 4095,3645 4095,3735 4105,3745 4370,3745 4430,3685 4430,3675

## Silkscreen, mask and mechanical layers (free items; w line width, h text height)
Bottom Overlay:
  circle w15: c4465.19,3260.01 r88.03
  circle w15: c3515.34,3260.32 r88.03
  circle w15: c3975.19,3260.01 r88.03
Outline:
  the board outline again, w10